# EAGLE board snes_usb (EAGLE 5.10)
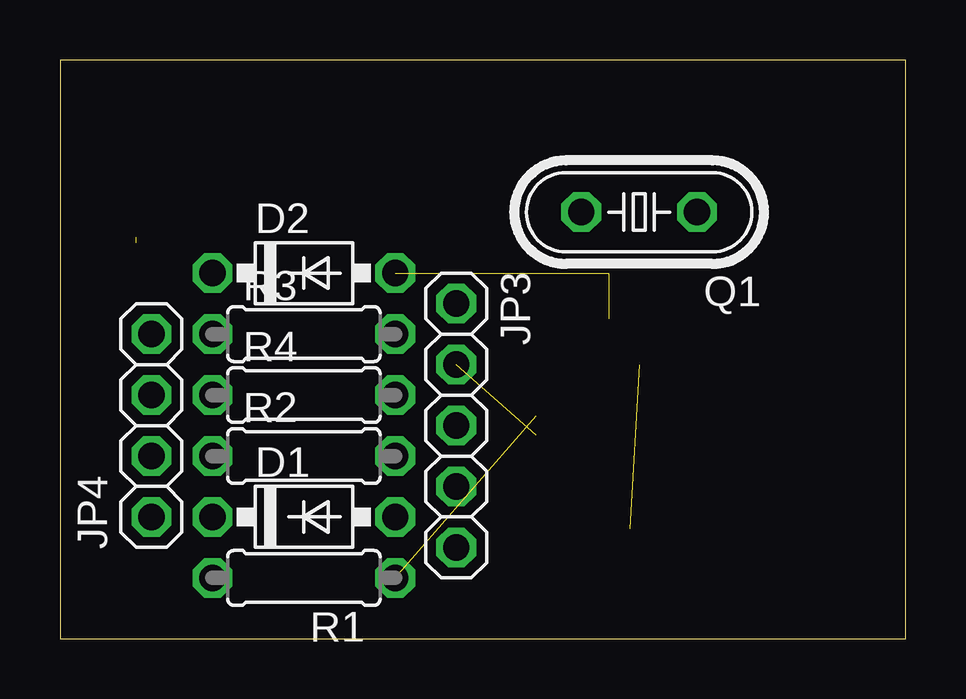
[diagram p0: board, top side]
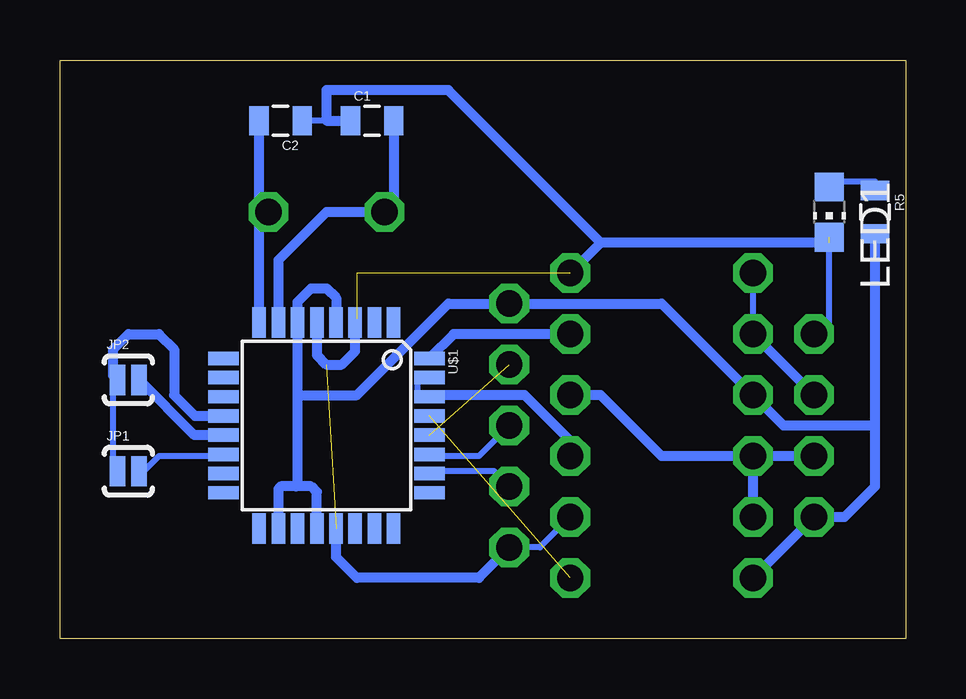
[diagram p1: board, bottom side, seen from below]

Size 35.23 x 24.12 mm. Coordinates in mm from the lower left corner, seen from the top.
Outline: 0,0 35.23,0 35.23,24.12 0,24.12 0,0
Copper layers (1*16): Top 0.035mm / dielectric 1.5mm / Bottom 0.035mm
Design rules "default": minimum track width 10mil, minimum drill 24mil, track to track 8mil, track to pad 8mil, pad to pad 8mil, via to via 8mil, smd to smd 8mil, copper to edge 40mil, drill to drill 8mil, minimum pad ring 10mil, minimum via ring 8mil, stop-mask expansion 4mil, vias tented up to drill 0mil, thermal gap 10mil

## Footprints (pad centres in the part's own frame; a part is rotated, then mirrored left to right if it is on the bottom)
0805 = smd 0.8 x 1.2: 1 -0.9,0; 2 0.9,0
DO41-7 = drill 1.1 octagon: A 3.81,0; C -3.81,0
SJ_2S-NO = smd 0.635 x 1.27: 1 -0.45,0; 2 0.45,0
1X05 = drill 1.1 octagon: 1 -5.08,0; 2 -2.54,0; 3 0,0; 4 2.54,0; 5 5.08,0
1X04 = drill 1.1 octagon: 1 -3.81,0; 2 -1.27,0; 3 1.27,0; 4 3.81,0
CHIP-LED0805 = smd 1.2 x 1.2: A 0,-1.05; C 0,1.05
HC49/S = drill 1.1 octagon: 1 -2.413,0; 2 2.413,0
0207/7 = drill 1.1 octagon: 1 -3.81,0; 2 3.81,0
TQFP32-08 = smd 1.27 x 0.559: 1 -4.293,2.8; 2 -4.293,2; 3 -4.293,1.2; 4 -4.293,0.4; 5 -4.293,-0.4; 6 -4.293,-1.2; 7 -4.293,-2; 8 -4.293,-2.8; 17 4.293,-2.8; 18 4.293,-2; 19 4.293,-1.2; 20 4.293,-0.4; 21 4.293,0.4; 22 4.293,1.2; 23 4.293,2; 24 4.293,2.8 | smd 0.559 x 1.27: 9 -2.8,-4.293; 10 -2,-4.293; 11 -1.2,-4.293; 12 -0.4,-4.293; 13 0.4,-4.293; 14 1.2,-4.293; 15 2,-4.293; 16 2.8,-4.293; 25 2.8,4.293; 26 2,4.293; 27 1.2,4.293; 28 0.4,4.293; 29 -0.4,4.293; 30 -1.2,4.293; 31 -2,4.293; 32 -2.8,4.293

## Placement (x,y rotation side)
C1  [0805]  22.23,21.59 0 bottom
C2  [0805]  26.04,21.59 180 bottom
D1  3.6V  [DO41-7]  10.16,5.08 0 top
D2  3.6V  [DO41-7]  10.16,15.24 0 top
JP1  [SJ_2S-NO]  32.38,6.98 0 bottom
JP2  [SJ_2S-NO]  32.38,10.8 0 bottom
JP3  [1X05]  16.51,8.89 270 top
JP4  [1X04]  3.81,8.89 90 top
LED1  [CHIP-LED0805]  3.18,17.78 180 bottom
Q1  [HC49/S]  24.13,17.78 180 top
R1  10k  [0207/7]  10.16,2.54 180 top
R2  68  [0207/7]  10.16,7.62 0 top
R3  68  [0207/7]  10.16,12.7 0 top
R4  1.5k  [0207/7]  10.16,10.16 0 top
R5  [0805]  1.27,17.78 270 bottom
U$1  AVR-MEGA8-AI  [TQFP32-08]  24.13,8.89 270 bottom

## Library data of the parts
C1 C2 D1 D2 JP1-JP4 LED1 Q1 R1-R5 U$1 = snes_usb

## Nets
+5V: JP3.1 JP4.1 R1.2 R4.1 R5.2 U$1.4 U$1.6 U$1.18 U$1.20
CLOCK: JP3.2 U$1.28
D+: D2.C JP4.3 R3.1
D-: D1.C JP4.2 R2.1 R4.2
DATA: JP3.4 U$1.26
GND: C1.1 C2.1 D1.A D2.A JP3.5 JP4.4 LED1.C U$1.3 U$1.5 U$1.21
LATCH: JP3.3 U$1.27
N$1: R1.1 U$1.29
N$2: C2.2 Q1.1 U$1.8
N$3: C1.2 Q1.2 U$1.7
N$4: R2.2 U$1.30 U$1.31
N$5: JP1.1 JP2.1 U$1.12
N$6: JP2.2 U$1.13
N$7: JP1.2 U$1.14
N$8: R3.2 U$1.32
N$9: LED1.A R5.1

## Tracks (layer width: path | path; a pad name or v marks a point on that pad's centre or on a via)
+5V
  Bottom 0.406: U$1.20 24.53,6.11 24.77,6.35 25.4,6.35 | U$1.18 26.13,6.25 26.04,6.35 25.4,6.35 | 25.33,10.16 25.33,6.42 25.4,6.35 | 25.33,10.16 U$1.6 25.33,14.04 24.77,14.6 24.13,14.6 23.73,14.2 U$1.4 | 25.33,10.16 22.86,10.16 19.05,13.97 JP3.1 10.16,13.97 R4.1 5.08,8.89 1.27,8.89 | 1.27,8.89 R5.2 | 1.27,8.89 1.27,6.35 2.54,5.08 JP4.1 R1.2
CLOCK  (1 unrouted)
D+
  Bottom 0.254: R3.1 D2.C
  Bottom 0.406: JP4.3 R3.1
D-
  Bottom 0.406: JP4.2 R2.1 | R2.1 10.16,7.62 12.7,10.16 R4.2 | D1.C R2.1
DATA
  Bottom 0.254: JP3.4 17.15,6.98 19.69,6.98 U$1.26
GND  (4 unrouted)
  Bottom 0.254: D1.A 15.24,3.81 JP3.5 17.15,3.17 | JP4.4 3.18,12.7 3.18,16.51 LED1.C | U$1.3 22.86,13.34 | 24.13,21.59 C2.1
  Bottom 0.406: U$1.3 22.93,11.99 23.5,11.43 24.13,11.43 24.53,11.83 U$1.5 | C1.1 24.13,21.59 24.13,22.86 19.05,22.86 12.7,16.51 | U$1.21 23.73,3.41 22.86,2.54 17.78,2.54 JP3.5 | 3.18,16.51 12.7,16.51 | 12.7,16.51 D2.A
LATCH
  Bottom 0.254: JP3.3 17.78,7.62 19.69,7.62 U$1.27
N$1  (1 unrouted)
N$2
  Bottom 0.406: U$1.8 26.93,17.39 Q1.1 26.94,18.17 C2.2
N$3
  Bottom 0.406: U$1.7 26.13,15.78 24.13,17.78 Q1.2 21.33,18.17 C1.2
N$4
  Bottom 0.254: U$1.31 20.32,10.8 20.32,10.16 U$1.30 19.69,10.16
  Bottom 0.406: R2.2 13.97,8.25 15.88,10.16 19.77,10.16 U$1.30
N$5
  Bottom 0.254: JP1.1 33.02,6.98 33.02,10.8 JP2.1
  Bottom 0.406: U$1.12 29.61,9.29 30.48,10.16 30.48,12.06 31.12,12.7 32.38,12.7 33.02,12.06 33.02,10.98 JP2.1
N$6
  Bottom 0.406: U$1.13 29.63,8.49 JP2.2
N$7
  Bottom 0.254: U$1.14 28.58,7.62 31.12,7.62 31.75,6.98 JP1.2
N$8
  Bottom 0.406: R3.2 18.83,12.7 U$1.32
N$9
  Bottom 0.254: R5.1 1.27,19.05 3.18,19.05 LED1.A